# EAGLE board CT_schematic (EAGLE 7.6.0)

Size 100 x 80 mm. Coordinates in mm from the lower left corner, seen from the top.
Outline: 0,0 100,0 100,80 0,80 0,0
Copper layers (1*16): Top 0.035mm / dielectric 1.5mm / Bottom 0.035mm
Design rules "default": minimum track width 10mil, minimum drill 24mil, track to track 8mil, track to pad 8mil, pad to pad 8mil, via to via 8mil, smd to smd 8mil, copper to edge 40mil, drill to drill 8mil, minimum pad ring 10mil, minimum via ring 8mil, stop-mask expansion 4mil, vias tented up to drill 0mil, thermal gap 10mil

## Footprints (pad centres in the part's own frame; a part is rotated, then mirrored left to right if it is on the bottom)
C0603 = smd 0.8 x 0.8: 1 -0.762,0; 2 0.762,0
C0402 = smd 0.5 x 0.5: 1 -0.508,0; 2 0.508,0
C0805 = smd 1.2 x 1.3: 1 -1.016,0; 2 1.016,0
2220 = smd 1.85 x 5.5: 1 -2.55,0; 2 2.55,0
C1206 = smd 1.3 x 1.6: 1 -1.524,0; 2 1.524,0
C1210 = smd 1.2 x 2.5: 1 -1.524,0; 2 1.524,0
EXV-9H = smd 3.505 x 1.676: 1 -2.857,0; 2 2.857,0
L0603 = smd 0.8 x 0.8: 1 -0.762,0; 2 0.762,0
DR1040 = smd 1.6 x 3.2: 1 -4.458,0; 2 4.458,0
PJ-037B_PACKAGE = drill 3.7 square: 1 12,0 | drill 3.2 square: 2 6,0
R0603 = smd 0.8 x 0.8: 1 -0.762,0; 2 0.762,0
LQFP176 = smd 0.3 x 1.2: 1 -10.75,-12.75; 2 -10.25,-12.75; 3 -9.75,-12.75; 4 -9.25,-12.75; 5 -8.75,-12.75; 6 -8.25,-12.75; 7 -7.75,-12.75; 8 -7.25,-12.75; 9 -6.75,-12.75; 10 -6.25,-12.75; 11 -5.75,-12.75; 12 -5.25,-12.75; 13 -4.75,-12.75; 14 -4.25,-12.75; 15 -3.75,-12.75; 16 -3.25,-12.75; 17 -2.75,-12.75; 18 -2.25,-12.75; 19 -1.75,-12.75; 20 -1.25,-12.75; 21 -0.75,-12.75; 22 -0.25,-12.75; 23 0.25,-12.75; 24 0.75,-12.75; 25 1.25,-12.75; 26 1.75,-12.75; 27 2.25,-12.75; 28 2.75,-12.75; 29 3.25,-12.75; 30 3.75,-12.75; 31 4.25,-12.75; 32 4.75,-12.75; 33 5.25,-12.75; 34 5.75,-12.75; 35 6.25,-12.75; 36 6.75,-12.75; 37 7.25,-12.75; 38 7.75,-12.75; 39 8.25,-12.75; 40 8.75,-12.75; 41 9.25,-12.75; 42 9.75,-12.75; 43 10.25,-12.75; 44 10.75,-12.75; 89 10.75,12.75; 90 10.25,12.75; 91 9.75,12.75; 92 9.25,12.75; 93 8.75,12.75; 94 8.25,12.75; 95 7.75,12.75; 96 7.25,12.75; 97 6.75,12.75; 98 6.25,12.75; 99 5.75,12.75; 100 5.25,12.75; 101 4.75,12.75; 102 4.25,12.75; 103 3.75,12.75; 104 3.25,12.75; 105 2.75,12.75; 106 2.25,12.75; 107 1.75,12.75; 108 1.25,12.75; 109 0.75,12.75; 110 0.25,12.75; 111 -0.25,12.75; 112 -0.75,12.75; 113 -1.25,12.75; 114 -1.75,12.75; 115 -2.25,12.75; 116 -2.75,12.75; 117 -3.25,12.75; 118 -3.75,12.75; 119 -4.25,12.75; 120 -4.75,12.75; 121 -5.25,12.75; 122 -5.75,12.75; 123 -6.25,12.75; 124 -6.75,12.75; 125 -7.25,12.75; 126 -7.75,12.75; 127 -8.25,12.75; 128 -8.75,12.75; 129 -9.25,12.75; 130 -9.75,12.75; 131 -10.25,12.75; 132 -10.75,12.75 | smd 1.2 x 0.3: 45 12.75,-10.75; 46 12.75,-10.25; 47 12.75,-9.75; 48 12.75,-9.25; 49 12.75,-8.75; 50 12.75,-8.25; 51 12.75,-7.75; 52 12.75,-7.25; 53 12.75,-6.75; 54 12.75,-6.25; 55 12.75,-5.75; 56 12.75,-5.25; 57 12.75,-4.75; 58 12.75,-4.25; 59 12.75,-3.75; 60 12.75,-3.25; 61 12.75,-2.75; 62 12.75,-2.25; 63 12.75,-1.75; 64 12.75,-1.25; 65 12.75,-0.75; 66 12.75,-0.25; 67 12.75,0.25; 68 12.75,0.75; 69 12.75,1.25; 70 12.75,1.75; 71 12.75,2.25; 72 12.75,2.75; 73 12.75,3.25; 74 12.75,3.75; 75 12.75,4.25; 76 12.75,4.75; 77 12.75,5.25; 78 12.75,5.75; 79 12.75,6.25; 80 12.75,6.75; 81 12.75,7.25; 82 12.75,7.75; 83 12.75,8.25; 84 12.75,8.75; 85 12.75,9.25; 86 12.75,9.75; 87 12.75,10.25; 88 12.75,10.75; 133 -12.75,10.75; 134 -12.75,10.25; 135 -12.75,9.75; 136 -12.75,9.25; 137 -12.75,8.75; 138 -12.75,8.25; 139 -12.75,7.75; 140 -12.75,7.25; 141 -12.75,6.75; 142 -12.75,6.25; 143 -12.75,5.75; 144 -12.75,5.25; 145 -12.75,4.75; 146 -12.75,4.25; 147 -12.75,3.75; 148 -12.75,3.25; 149 -12.75,2.75; 150 -12.75,2.25; 151 -12.75,1.75; 152 -12.75,1.25; 153 -12.75,0.75; 154 -12.75,0.25; 155 -12.75,-0.25; 156 -12.75,-0.75; 157 -12.75,-1.25; 158 -12.75,-1.75; 159 -12.75,-2.25; 160 -12.75,-2.75; 161 -12.75,-3.25; 162 -12.75,-3.75; 163 -12.75,-4.25; 164 -12.75,-4.75; 165 -12.75,-5.25; 166 -12.75,-5.75; 167 -12.75,-6.25; 168 -12.75,-6.75; 169 -12.75,-7.25; 170 -12.75,-7.75; 171 -12.75,-8.25; 172 -12.75,-8.75; 173 -12.75,-9.25; 174 -12.75,-9.75; 175 -12.75,-10.25; 176 -12.75,-10.75
SOT-23-6 = smd 1.1 x 0.6: 1 -1.4,0.95; 2 -1.4,0; 3 -1.4,-0.95; 4 1.4,-0.95; 5 1.4,0; 6 1.4,0.95
VFBGA48 = smd 0.35 x 0.35: A1 -1.875,2.625; A2 -1.125,2.625; A3 -0.375,2.625; A4 0.375,2.625; A5 1.125,2.625; A6 1.875,2.625; B1 -1.875,1.875; B2 -1.125,1.875; B3 -0.375,1.875; B4 0.375,1.875; B5 1.125,1.875; B6 1.875,1.875; C1 -1.875,1.125; C2 -1.125,1.125; C3 -0.375,1.125; C4 0.375,1.125; C5 1.125,1.125; C6 1.875,1.125; D1 -1.875,0.375; D2 -1.125,0.375; D3 -0.375,0.375; D4 0.375,0.375; D5 1.125,0.375; D6 1.875,0.375; E1 -1.875,-0.375; E2 -1.125,-0.375; E3 -0.375,-0.375; E4 0.375,-0.375; E5 1.125,-0.375; E6 1.875,-0.375; F1 -1.875,-1.125; F2 -1.125,-1.125; F3 -0.375,-1.125; F4 0.375,-1.125; F5 1.125,-1.125; F6 1.875,-1.125; G1 -1.875,-1.875; G2 -1.125,-1.875; G3 -0.375,-1.875; G4 0.375,-1.875; G5 1.125,-1.875; G6 1.875,-1.875; H1 -1.875,-2.625; H2 -1.125,-2.625; H3 -0.375,-2.625; H4 0.375,-2.625; H5 1.125,-2.625; H6 1.875,-2.625
AT24C02D = smd 1.6 x 0.6: 1 -2.475,1.905 | smd 1.55 x 0.6: 2 -2.475,0.635; 3 -2.475,-0.635; 4 -2.475,-1.905; 5 2.475,-1.905; 6 2.475,-0.635; 7 2.475,0.635; 8 2.475,1.905
TDFN-8/6MM = smd 0.3 x 0.75: 1 0,0; 2 0.5,0; 3 1,0; 4 1.5,0; 5 1.5,3; 6 1,3; 7 0.5,3; 8 0,3
USB-A-H = drill 0.914: 1 2.718,3.493; 2 2.718,1.003; 3 2.718,-1.003; 4 2.718,-3.493 | drill 2.311: 5 0,-6.566; 6 0,6.566
SOT143B = smd 1 x 0.7: 1 -0.75,-1 | smd 0.6 x 0.7: 2 0.95,-1; 3 0.95,1; 4 -0.95,1
ABS07-32.768KHZ-7-T = smd 1.1 x 2.4: 1 -2.5,0; 2 0,0
ABLS-25.000MHZ-B2F-T = smd 5.6 x 2.8: 1 -3.81,0; 2 5.69,0
QFN-16_EP = smd 0.805 x 0.3: 1 -1.452,0.75; 2 -1.452,0.25; 3 -1.452,-0.25; 4 -1.452,-0.75; 9 1.452,-0.75; 10 1.452,-0.25; 11 1.452,0.25; 12 1.452,0.75 | smd 0.3 x 0.805: 5 -0.75,-1.452; 6 -0.25,-1.452; 7 0.25,-1.452; 8 0.75,-1.452; 13 0.75,1.452; 14 0.25,1.452; 15 -0.25,1.452; 16 -0.75,1.452 | smd 1.55 x 1.55: 17 0,0
WSON-8 = smd 0.3 x 0.6: 1 -0.75,0; 2 0.05,0; 3 0.85,0; 4 1.65,0; 5 1.65,3.8; 6 0.85,3.8; 7 0.05,3.8; 8 -0.75,3.8 | smd 3 x 2.6: PAD 0.45,1.9
SON-6 = smd 0.55 x 0.3: 1 -0.355,0.5 | smd 0.52 x 0.3: 2 -0.37,0; 3 -0.37,-0.5; 4 0.37,-0.5; 5 0.37,0; 6 0.37,0.5
SW_4-1437565-2 = smd 1.4 x 2.1: 1 -2.23,4.55; 2 -2.23,-4.55; 3 2.23,4.55; 4 2.23,-4.55
LGM67K-G1J2-24-Z = smd 0.8 x 1.4: A -2,0; C 0,0
NC7SZ125M5X = smd 1.3 x 0.7: 1 -1.3,0.95; 2 -1.3,0; 3 -1.3,-0.95; 4 1.3,-0.95; 5 1.3,0.95

## Placement (x,y rotation side)
C1  1e-06  [C0603]  -22.86,72.39 0 top  (outside the outline)
C2  1e-07  [C0603]  -26.67,72.39 0 top  (outside the outline)
C3  1e-07  [C0603]  -30.48,72.39 0 top  (outside the outline)
C4  1e-07  [C0603]  -34.29,72.39 0 top  (outside the outline)
C5  1e-07  [C0603]  -38.1,72.39 0 top  (outside the outline)
C6  1e-07  [C0603]  -41.91,72.39 0 top  (outside the outline)
C7  1e-07  [C0603]  -45.72,72.39 0 top  (outside the outline)
C8  1e-07  [C0603]  -49.53,72.39 0 top  (outside the outline)
C9  1e-07  [C0603]  -53.34,72.39 0 top  (outside the outline)
C10  1e-07  [C0603]  -57.15,72.39 0 top  (outside the outline)
C11  1e-07  [C0603]  -60.96,72.39 0 top  (outside the outline)
C12  1e-07  [C0603]  -64.77,72.39 0 top  (outside the outline)
C13  1e-07  [C0603]  -68.58,72.39 0 top  (outside the outline)
C14  1e-07  [C0603]  -72.39,72.39 0 top  (outside the outline)
C15  1e-07  [C0603]  -76.2,72.39 0 top  (outside the outline)
C16  1e-07  [C0603]  -15.24,77.47 0 top  (outside the outline)
C17  1e-07  [C0603]  -19.05,77.47 0 top  (outside the outline)
C18  4.7e-06  [C0603]  -74.93,67.31 0 top  (outside the outline)
C19  1e-07  [C0603]  -22.86,77.47 0 top  (outside the outline)
C20  1e-08  [C0603]  -26.67,77.47 0 top  (outside the outline)
C21  1e-06  [C0603]  -30.48,77.47 0 top  (outside the outline)
C22  1e-07  [C0603]  -34.29,77.47 0 top  (outside the outline)
C23  2.2e-06  [C0603]  -78.74,67.31 0 top  (outside the outline)
C24  2.2e-06  [C0603]  -15.24,72.39 0 top  (outside the outline)
C25  1e-11  [C0402]  -21.59,82.55 0 top  (outside the outline)
C26  1e-11  [C0402]  -25.4,82.55 0 top  (outside the outline)
C27  1e-11  [C0402]  -29.21,82.55 0 top  (outside the outline)
C28  1e-11  [C0402]  -33.02,82.55 0 top  (outside the outline)
C29  1e-07  [C0402]  -36.83,82.55 0 top  (outside the outline)
C30  2.2e-06  [C0603]  -19.05,72.39 0 top  (outside the outline)
C31  1e-08  [C0402]  -40.64,82.55 0 top  (outside the outline)
C32  1e-08  [C0402]  -44.45,82.55 0 top  (outside the outline)
C33  1e-05  [C0805]  -26.67,60.96 0 top  (outside the outline)
C34  1e-06  [C0603]  -38.1,77.47 0 top  (outside the outline)
C35  1e-07  [C0402]  -48.26,82.55 0 top  (outside the outline)
C36  6.8e-05  [2220]  -34.29,45.72 0 top  (outside the outline)
C37  1e-08  [C0402]  -52.07,82.55 0 top  (outside the outline)
C38  1e-05  [C1206]  -76.2,53.34 0 top  (outside the outline)
C39  1e-05  [C1210]  -69.85,53.34 0 top  (outside the outline)
C40  1e-07  [C0402]  -55.88,82.55 0 top  (outside the outline)
C41  0.0001  [EXV-9H]  -63.5,44.45 0 top  (outside the outline)
C42  0.0001  [EXV-9H]  -74.93,44.45 0 top  (outside the outline)
C43  1e-08  [C0402]  -59.69,82.55 0 top  (outside the outline)
F1  240.0  [L0603]  -41.91,77.47 0 top  (outside the outline)
I1  3.8e-06  [DR1040]  -57.15,33.02 0 top  (outside the outline)
J1  PJ-037B  [PJ-037B_PACKAGE]  -72.39,7.62 0 top  (outside the outline)
R2  1000.0  [R0603]  -45.72,77.47 0 top  (outside the outline)
R7  4700.0  [R0603]  -49.53,77.47 0 top  (outside the outline)
R8  2200.0  [R0603]  -53.34,77.47 0 top  (outside the outline)
R10  2200.0  [R0603]  -57.15,77.47 0 top  (outside the outline)
R12  2200.0  [R0603]  -60.96,77.47 0 top  (outside the outline)
R14  2200.0  [R0603]  -64.77,77.47 0 top  (outside the outline)
R16  47000.0  [R0603]  -52.07,60.96 0 top  (outside the outline)
R17  10000.0  [R0603]  -57.15,60.96 0 top  (outside the outline)
R18  10000.0  [R0603]  -62.23,60.96 0 top  (outside the outline)
R19  10000.0  [R0603]  -67.31,60.96 0 top  (outside the outline)
R20  1270.0  [R0603]  -68.58,77.47 0 top  (outside the outline)
R21  10000.0  [R0603]  -72.39,60.96 0 top  (outside the outline)
R22  10000.0  [R0603]  -77.47,60.96 0 top  (outside the outline)
R23  10000.0  [R0603]  -15.24,67.31 0 top  (outside the outline)
R24  10000.0  [R0603]  -20.32,67.31 0 top  (outside the outline)
R25  10000.0  [R0603]  -25.4,67.31 0 top  (outside the outline)
R26  10000.0  [R0603]  -30.48,67.31 0 top  (outside the outline)
R27  10000.0  [R0603]  -35.56,67.31 0 top  (outside the outline)
R28  10000.0  [R0603]  -40.64,67.31 0 top  (outside the outline)
R29  10000.0  [R0603]  -45.72,67.31 0 top  (outside the outline)
R30  20000.0  [R0603]  -50.8,67.31 0 top  (outside the outline)
R31  62000.0  [R0603]  -55.88,67.31 0 top  (outside the outline)
R32  300000.0  [R0603]  -31.75,60.96 0 top  (outside the outline)
R33  100000.0  [R0603]  -36.83,60.96 0 top  (outside the outline)
R34  3900.0  [R0603]  -72.39,77.47 0 top  (outside the outline)
R35  1000.0  [R0603]  -76.2,77.47 0 top  (outside the outline)
R36  10000.0  [R0603]  -60.96,67.31 0 top  (outside the outline)
R37  10000.0  [R0603]  -66.04,67.31 0 top  (outside the outline)
R38  18000.0  [R0603]  -71.12,67.31 0 top  (outside the outline)
R39  470000.0  [R0603]  -41.91,60.96 0 top  (outside the outline)
R40  120000.0  [R0603]  -46.99,60.96 0 top  (outside the outline)
U1  STM32F777IIT6  [LQFP176]  -26.67,13.97 0 top  (outside the outline)
U2  MAX4995AAUT+T  [SOT-23-6]  -15.24,59.69 0 top  (outside the outline)
U3  CY62147GE30-45BVXI  [VFBGA48]  -29.21,34.29 0 top  (outside the outline)
U4  AT24C02D-SSHM-T  [AT24C02D]  -25.4,45.72 0 top  (outside the outline)
U5  24AA01T-I/MNY  [TDFN-8/6MM]  -73.66,31.75 0 top  (outside the outline)
U6  61400416021  [USB-A-H]  -46.99,8.89 0 top  (outside the outline)
U7  prtr5v0u2ax  [SOT143B]  -72.39,82.55 0 top  (outside the outline)
U8  ABS07-32.768KHZ-7-T  [ABS07-32.768KHZ-7-T]  -49.53,54.61 0 top  (outside the outline)
U9  ABLS-25.000MHZ-B2F-T  [ABLS-25.000MHZ-B2F-T]  -26.67,54.61 0 top  (outside the outline)
U10  LTC3601EUD#PBF  [QFN-16_EP]  -15.24,82.55 0 top  (outside the outline)
U11  LP3878SDX-ADJ/NOPB  [WSON-8]  -55.88,43.18 0 top  (outside the outline)
U12  TPS3895ADRYR  [SON-6]  -76.2,81.28 0 top  (outside the outline)
U13  4-1437565-2  [SW_4-1437565-2]  -46.99,34.29 0 top  (outside the outline)
U14  Q65110A2395  [LGM67K-G1J2-24-Z]  -58.42,53.34 0 top  (outside the outline)
U15  nc7sz125m5x  [NC7SZ125M5X]  -20.32,60.96 0 top  (outside the outline)

## Library data of the parts
C1-C43 F1 I1 J1 R2 R7 R8 R10 R12 R14 R16-R40 U1-U15 = circuit_tree

## Nets
CLK_CRYSTAL_U1_9: C25.1 U1.9 U8.1
CLK_CRYSTAL_U1_10: C26.1 U1.10 U8.2
CLK_CRYSTAL_U1_29: C27.1 U1.29 U9.1
CLK_CRYSTAL_U1_30: C28.1 U1.30 U9.2
GND: C1.2 C2.2 C3.2 C4.2 C5.2 C6.2 C7.2 C8.2 C9.2 C10.2 C11.2 C12.2 C13.2 C14.2 C15.2 C16.2 C17.2 C18.2 C19.2 C20.2 C21.2 C22.2 C23.2 C24.2 C25.2 C26.2 C27.2 C28.2 C29.2 C30.2 C31.2 C32.2 C33.2 C34.2 C36.1 C36.2 C37.2 C38.2 C39.2 C40.2 C41.2 C42.2 C43.2 J1.2 R2.2 R16.2 R17.2 R19.2 R20.2 R22.2 R26.2 R28.2 R29.2 R30.2 R32.2 R35.2 R38.2 R40.2 U1.14 U1.22 U1.37 U1.61 U1.71 U1.90 U1.102 U1.113 U1.126 U1.135 U1.148 U1.158 U2.2 U3.D1 U3.E6 U4.4 U5.4 U6.4 U6.5 U6.6 U7.1 U10.1 U10.9 U10.17 U11.3 U11.PAD U12.2 U14.C U15.1 U15.3
NET_U1_31: R7.1 U1.31 U15.4
NET_U1_39: C20.1 C21.1 F1.1 U1.38 U1.39
NET_U1_45: R12.1 U1.45 U5.6
NET_U1_46: R14.1 U1.46 U5.5
NET_U1_48: R19.1 U1.48
NET_U1_81: C23.1 U1.81
NET_U1_121: R20.1 U1.121
NET_U1_125: C24.1 U1.125
NET_U1_164: R8.1 U1.164 U4.6
NET_U1_165: R10.1 U1.165 U4.5
NET_U1_166: R17.1 U1.166
NET_U1_171: R18.1 U1.171
NET_U1_175: U14.A
NET_U1_176: U13.3 U13.4
NET_U2_3: R16.1 U2.3
NET_U4_1: R27.1 U4.1
NET_U4_2: R28.1 U4.2
NET_U4_3: R29.1 U4.3
NET_U4_7: R26.1 U4.7
NET_U10_3: C35.2 I1.1 U10.3 U10.4
NET_U10_6: C35.1 U10.6
NET_U10_7: C34.1 U10.7 U10.12
NET_U10_10: R32.1 U10.10
NET_U10_11: R30.1 R31.1 U10.11
NET_U10_14: U10.14
NET_U10_ATNET_3: I1.2 R31.2
NET_U11_1: C37.1 U11.1
NET_U11_6: R34.2 R35.1 U11.6
NET_U11_8: R33.1 U11.8
NET_U12_1: R37.1 R38.1 U12.1
NET_U12_3: R39.2 R40.1 U12.3
NET_U12_4: R36.1 U12.4 U15.2
NET_U13_1: R2.1 U13.1 U13.2
PROC_FMC_A0: U1.16 U3.A3
PROC_FMC_A1: U1.17 U3.A4
PROC_FMC_A2: U1.18 U3.A5
PROC_FMC_A3: U1.19 U3.B3
PROC_FMC_A4: U1.20 U3.B4
PROC_FMC_A5: U1.21 U3.C3
PROC_FMC_A6: U1.60 U3.C4
PROC_FMC_A7: U1.63 U3.D4
PROC_FMC_A8: U1.64 U3.H2
PROC_FMC_A9: U1.65 U3.H3
PROC_FMC_A10: U1.66 U3.H4
PROC_FMC_A11: U1.67 U3.H5
PROC_FMC_A12: U1.106 U3.G3
PROC_FMC_A13: U1.107 U3.G4
PROC_FMC_A14: U1.108 U3.F3
PROC_FMC_A15: U1.109 U3.F4
PROC_FMC_A16: U1.99 U3.E4
PROC_FMC_A17: U1.100 U3.D3
PROC_FMC_D0: U1.104 U3.B6
PROC_FMC_D1: U1.105 U3.C5
PROC_FMC_D2: U1.142 U3.C6
PROC_FMC_D3: U1.143 U3.D5
PROC_FMC_D4: U1.68 U3.E5
PROC_FMC_D5: U1.69 U3.F5
PROC_FMC_D6: U1.70 U3.F6
PROC_FMC_D7: U1.73 U3.G6
PROC_FMC_D8: U1.74 U3.B1
PROC_FMC_D9: U1.75 U3.C1
PROC_FMC_D10: U1.76 U3.C2
PROC_FMC_D11: U1.77 U3.D2
PROC_FMC_D12: U1.78 U3.E2
PROC_FMC_D13: U1.96 U3.F2
PROC_FMC_D14: U1.97 U3.F1
PROC_FMC_D15: U1.98 U3.G1
PROC_FMC_NBL0: U1.169 U3.A1
PROC_FMC_NE2: R24.1 U1.117 U3.B5
PROC_FMC_NOE: R23.1 U1.146 U3.A2
PROC_FMC_NWE: R25.1 U1.147 U3.G5
PROC_GPIO_TO_U1_USB_FAULT: R21.1 U1.2 U2.6
PROC_GPIO_TO_U1_VBUS_EN: R22.1 U1.1 U2.4
PROC_USB_OTG_FS_DM: U1.122 U6.2 U7.3
PROC_USB_OTG_FS_DP: U1.123 U6.3 U7.2
PROC_USB_OTG_FS_VBUS: U1.120 U2.1 U6.1 U7.4
VCC_S1_10V1: C33.1 C38.1 C41.1 C42.1 J1.1 R33.2 U10.15 U10.16 U11.4
VCC_TIER1_2V5: C1.1 C2.1 C3.1 C4.1 C5.1 C6.1 C7.1 C8.1 C9.1 C10.1 C11.1 C12.1 C13.1 C14.1 C15.1 C16.1 C17.1 C18.1 C19.1 C22.1 C29.1 C30.1 C31.1 C32.1 C36.2 C40.1 C43.1 F1.2 I1.2 R7.2 R8.2 R10.2 R12.2 R14.2 R18.2 R21.2 R23.2 R24.2 R25.2 R27.2 R31.2 R36.2 R37.2 R39.1 U1.6 U1.15 U1.23 U1.36 U1.49 U1.62 U1.72 U1.82 U1.91 U1.103 U1.114 U1.127 U1.136 U1.149 U1.159 U1.172 U3.D6 U3.E1 U4.8 U5.7 U5.8 U10.8 U12.6 U15.5
VCC_TIER1_5V0: C39.1 R34.1 U2.5 U11.5

## Tracks (layer width: path | path; a pad name or v marks a point on that pad's centre or on a via)
CLK_CRYSTAL_U1_9  (2 unrouted)
CLK_CRYSTAL_U1_10  (2 unrouted)
CLK_CRYSTAL_U1_29  (2 unrouted)
CLK_CRYSTAL_U1_30  (2 unrouted)
GND  (87 unrouted)
NET_U1_31  (2 unrouted)
NET_U1_39  (4 unrouted)
NET_U1_45  (2 unrouted)
NET_U1_46  (2 unrouted)
NET_U1_48  (1 unrouted)
NET_U1_81  (1 unrouted)
NET_U1_121  (1 unrouted)
NET_U1_125  (1 unrouted)
NET_U1_164  (2 unrouted)
NET_U1_165  (2 unrouted)
NET_U1_166  (1 unrouted)
NET_U1_171  (1 unrouted)
NET_U1_176  (1 unrouted)
NET_U2_3  (1 unrouted)
NET_U4_1  (1 unrouted)
NET_U4_2  (1 unrouted)
NET_U4_3  (1 unrouted)
NET_U4_7  (1 unrouted)
NET_U10_3  (3 unrouted)
NET_U10_6  (1 unrouted)
NET_U10_7  (2 unrouted)
NET_U10_10  (1 unrouted)
NET_U10_11  (2 unrouted)
NET_U10_ATNET_3  (1 unrouted)
NET_U11_1  (1 unrouted)
NET_U11_6  (2 unrouted)
NET_U11_8  (1 unrouted)
NET_U12_1  (2 unrouted)
NET_U12_3  (2 unrouted)
NET_U12_4  (2 unrouted)
NET_U13_1  (2 unrouted)
PROC_FMC_A0  (1 unrouted)
PROC_FMC_A1  (1 unrouted)
PROC_FMC_A2  (1 unrouted)
PROC_FMC_A3  (1 unrouted)
PROC_FMC_A4  (1 unrouted)
PROC_FMC_A5  (1 unrouted)
PROC_FMC_A6  (1 unrouted)
PROC_FMC_A7  (1 unrouted)
PROC_FMC_A8  (1 unrouted)
PROC_FMC_A9  (1 unrouted)
PROC_FMC_A10  (1 unrouted)
PROC_FMC_A11  (1 unrouted)
PROC_FMC_A12  (1 unrouted)
PROC_FMC_A13  (1 unrouted)
PROC_FMC_A14  (1 unrouted)
PROC_FMC_A15  (1 unrouted)
PROC_FMC_A16  (1 unrouted)
PROC_FMC_A17  (1 unrouted)
PROC_FMC_D0  (1 unrouted)
PROC_FMC_D1  (1 unrouted)
PROC_FMC_D2  (1 unrouted)
PROC_FMC_D3  (1 unrouted)
PROC_FMC_D4  (1 unrouted)
PROC_FMC_D5  (1 unrouted)
PROC_FMC_D6  (1 unrouted)
PROC_FMC_D7  (1 unrouted)
PROC_FMC_D8  (1 unrouted)
PROC_FMC_D9  (1 unrouted)
PROC_FMC_D10  (1 unrouted)
PROC_FMC_D11  (1 unrouted)
PROC_FMC_D12  (1 unrouted)
PROC_FMC_D13  (1 unrouted)
PROC_FMC_D14  (1 unrouted)
PROC_FMC_D15  (1 unrouted)
PROC_FMC_NBL0  (1 unrouted)
PROC_FMC_NE2  (2 unrouted)
PROC_FMC_NOE  (2 unrouted)
PROC_FMC_NWE  (2 unrouted)
PROC_GPIO_TO_U1_USB_FAULT  (2 unrouted)
PROC_GPIO_TO_U1_VBUS_EN  (2 unrouted)
PROC_USB_OTG_FS_DM  (2 unrouted)
PROC_USB_OTG_FS_DP  (2 unrouted)
PROC_USB_OTG_FS_VBUS  (3 unrouted)
VCC_S1_10V1  (8 unrouted)
VCC_TIER1_2V5  (67 unrouted)
VCC_TIER1_5V0  (3 unrouted)